# EAGLE board SparkFun_esp32_Environment_Sensor_Shield_Panel_v10 (EAGLE 7.5.0), part 1 of 3
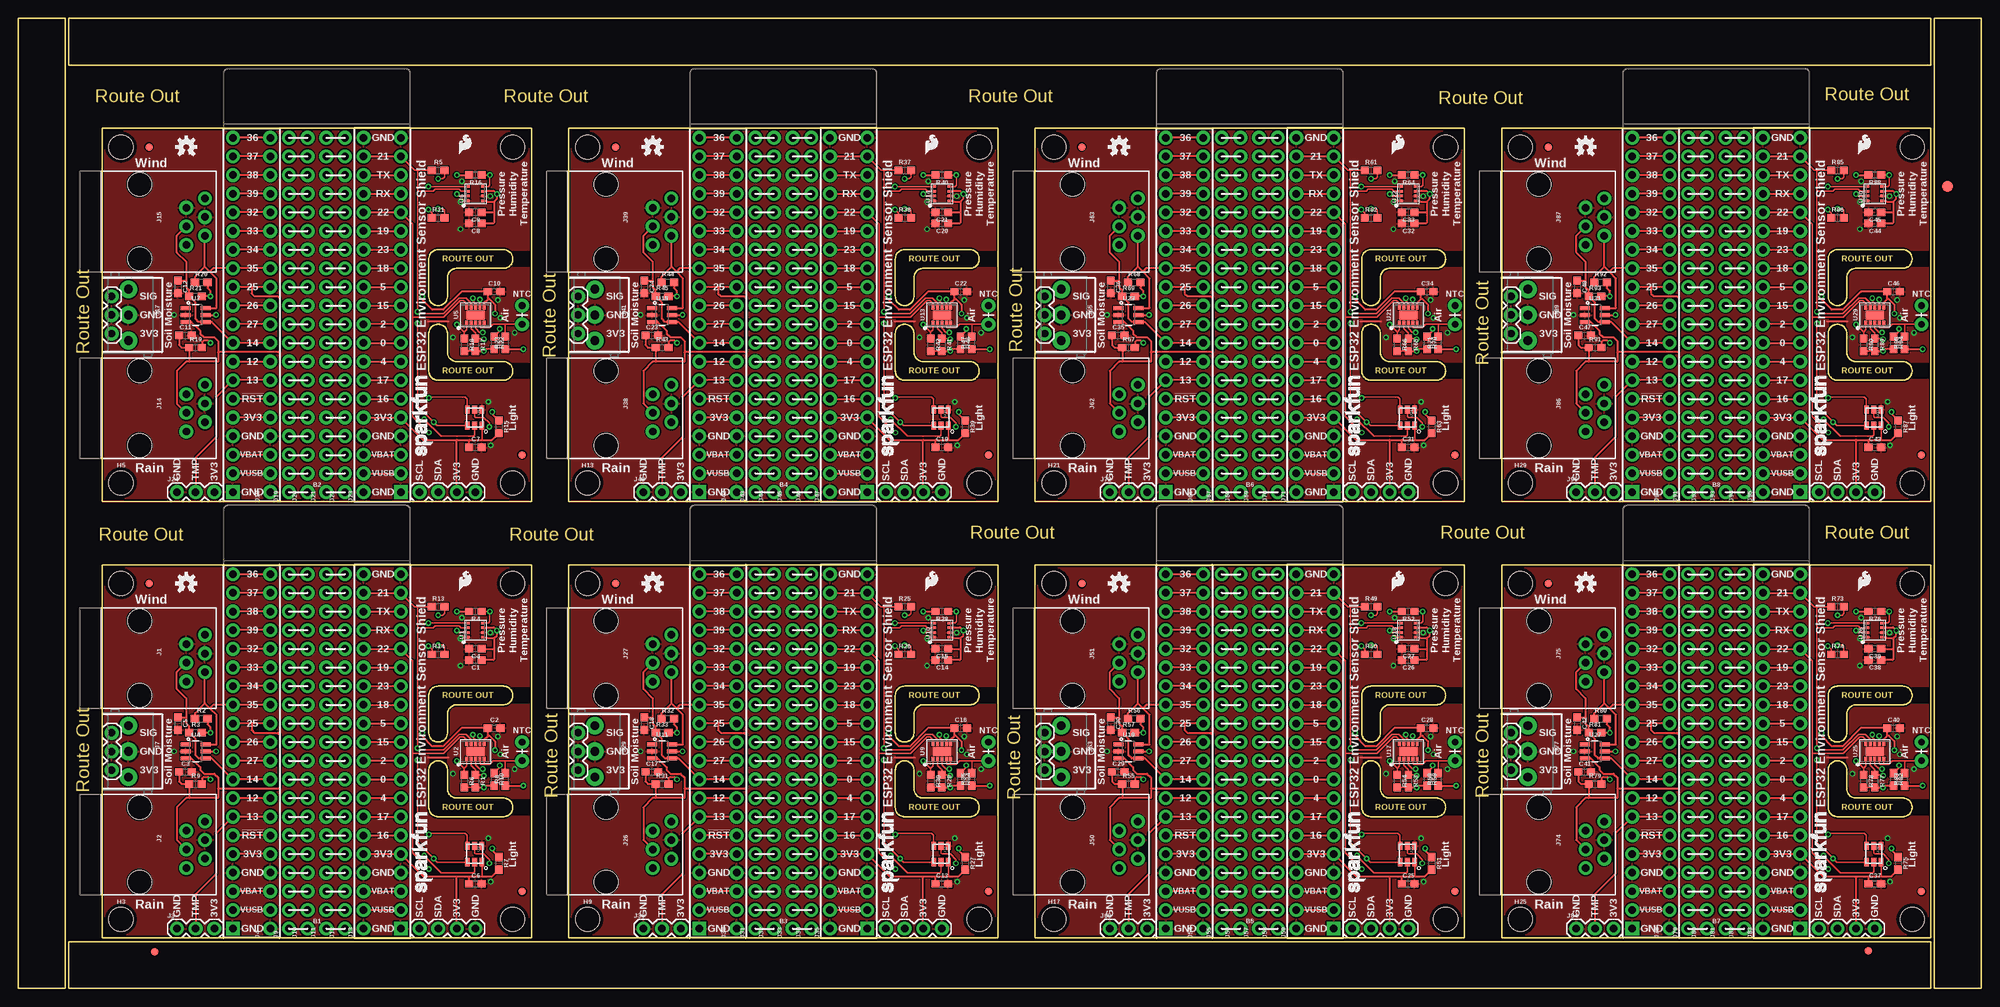
[diagram p0: board, top side]
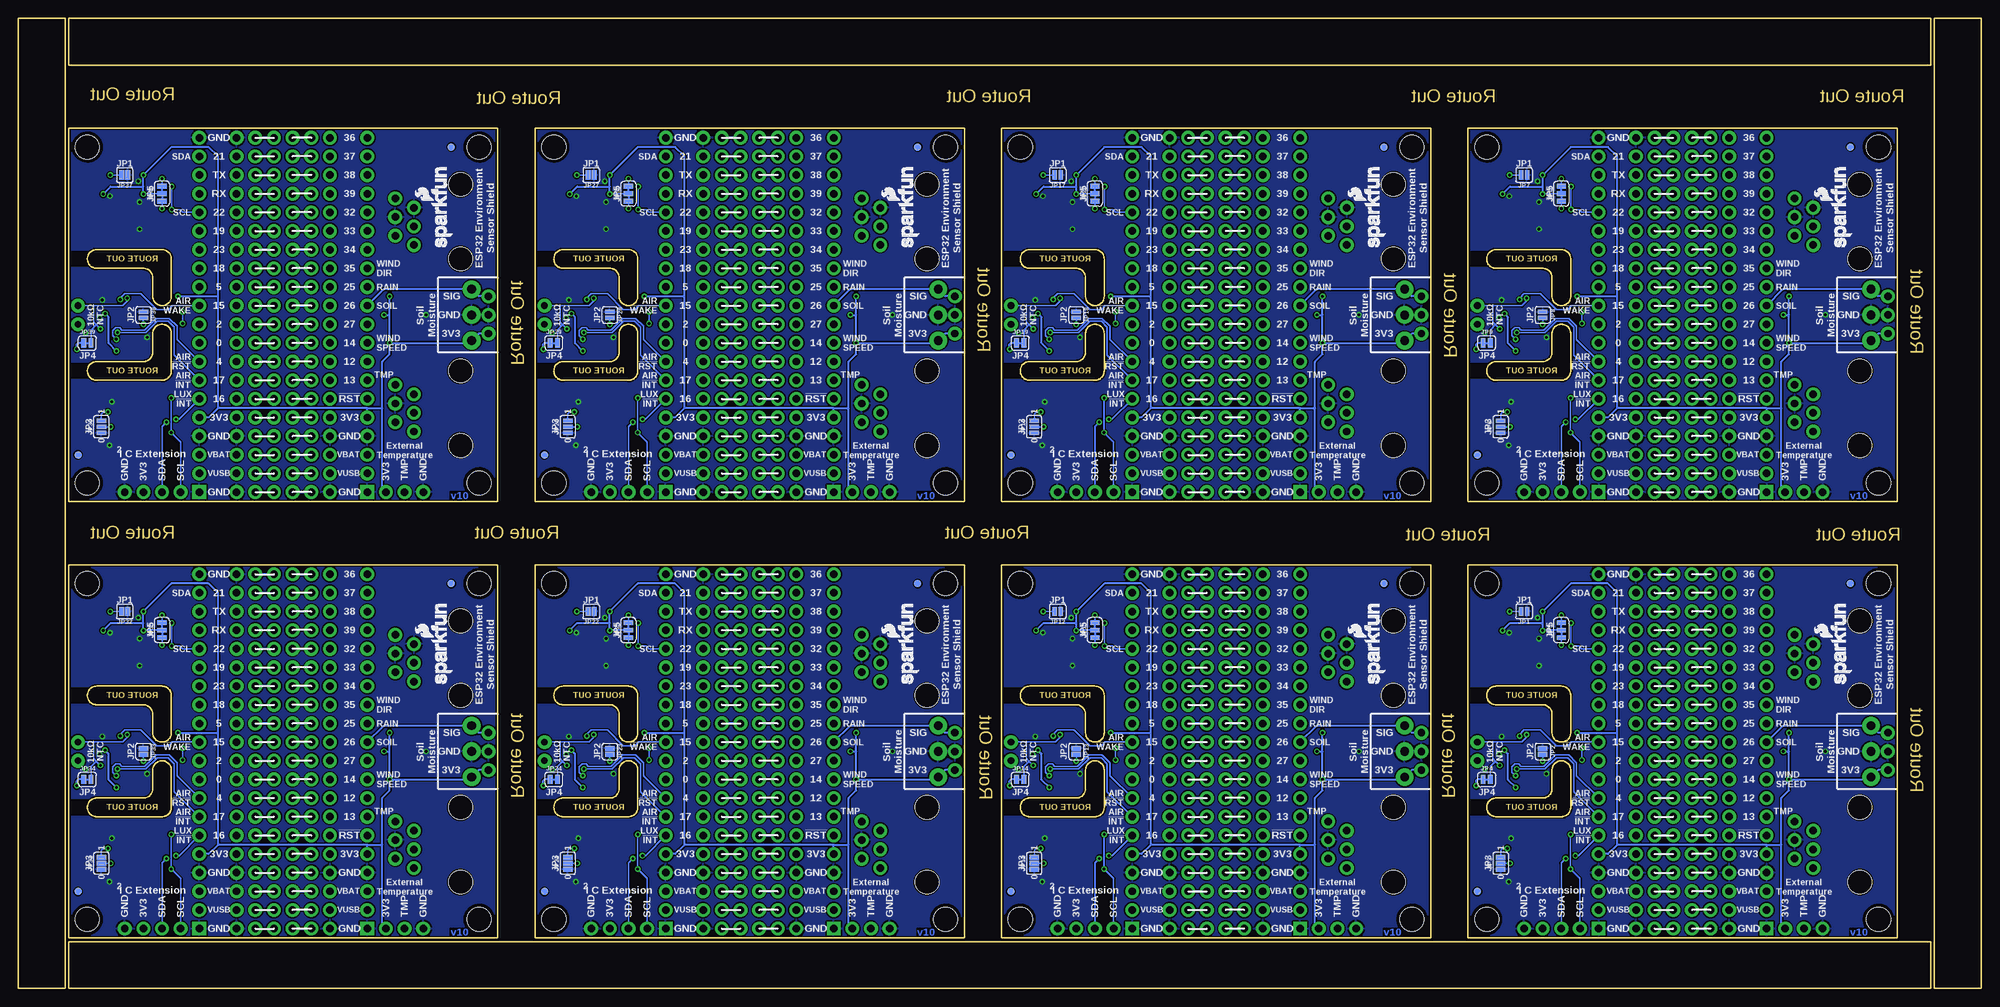
[diagram p1: board, bottom side, seen from below]

Size 267.21 x 132.08 mm. Coordinates in mm from the lower left corner, seen from the top.
Outline: 216 segments
Copper layers (1*16): Top 0.035mm / dielectric 1.5mm / Bottom 0.035mm
Design rules "SparkFun-2-layer-TIGHT": minimum track width 7mil, minimum drill 15mil, track to track 7mil, track to pad 7mil, pad to pad 7mil, via to via 7mil, smd to smd 7mil, copper to edge 7mil, drill to drill 7mil, minimum pad ring 7mil, minimum via ring 7mil, stop-mask expansion 4mil, vias tented up to drill 25mil, thermal gap 10mil
Milling: area 55.9,33.5 to 67.3,41.1; area 55.9,23.4 to 67.3,31; area 55.9,93 to 67.3,100.6; area 55.9,82.8 to 67.3,90.4; area 119.4,33.5 to 130.8,41.1; area 119.4,23.4 to 130.8,31; area 119.4,93 to 130.8,100.6; area 119.4,82.8 to 130.8,90.4; area 182.9,33.5 to 194.3,41.1; area 182.9,23.4 to 194.3,31; area 182.9,93 to 194.3,100.6; area 182.9,82.8 to 194.3,90.4; 4 more areas

## Footprints (pad centres in the part's own frame; a part is rotated, then mirrored left to right if it is on the bottom)
ESP32_THING = drill 1.016 pad 1.88 square: 1 1.27,1.27; 40 24.13,1.27 | drill 1.016 pad 1.88: 2 1.27,3.81; 3 1.27,6.35; 4 1.27,8.89; 5 1.27,11.43; 6 1.27,13.97; 7 1.27,16.51; 8 1.27,19.05; 9 1.27,21.59; 10 1.27,24.13; 11 1.27,26.67; 12 1.27,29.21; 13 1.27,31.75; 14 1.27,34.29; 15 1.27,36.83; 16 1.27,39.37; 17 1.27,41.91; 18 1.27,44.45; 19 1.27,46.99; 20 1.27,49.53; 21 24.13,49.53; 22 24.13,46.99; 23 24.13,44.45; 24 24.13,41.91; 25 24.13,39.37; 26 24.13,36.83; 27 24.13,34.29; 28 24.13,31.75; 29 24.13,29.21; 30 24.13,26.67; 31 24.13,24.13; 32 24.13,21.59; 33 24.13,19.05; 34 24.13,16.51; 35 24.13,13.97; 36 24.13,11.43; 37 24.13,8.89; 38 24.13,6.35; 39 24.13,3.81
0603 = smd 1.1 x 1: 1 -0.85,0; 2 0.85,0
FIDUCIAL-1.5X3 = smd 1.5 x 1.5: 1 0,0
FIDUCIAL-1X2 = smd 1 x 1: 1 0,0
STAND-OFF = hole 3.302: 0,0
RJ11-6 = drill 1.016 pad 1.88: 1 -3.175,8.89; 2 -1.905,6.35; 3 -0.635,8.89; 4 0.635,6.35; 5 1.905,8.89; 6 3.175,6.35 | hole 3.251: -5.08,0; 5.08,0
1X03 = drill 1.016 pad 1.88: 1 0,0; 2 2.54,0; 3 5.08,0
1X20_NOSILK = drill 1.016 pad 1.88: 1 0,0; 2 2.54,0; 3 5.08,0; 4 7.62,0; 5 10.16,0; 6 12.7,0; 7 15.24,0; 8 17.78,0; 9 20.32,0; 10 22.86,0; 11 25.4,0; 12 27.94,0; 13 30.48,0; 14 33.02,0; 15 35.56,0; 16 38.1,0; 17 40.64,0; 18 43.18,0; 19 45.72,0; 20 48.26,0
1X04 = drill 1.016 pad 1.88: 1 0,0; 2 2.54,0; 3 5.08,0; 4 7.62,0
SCREWTERMINAL-3.5MM-3-NS = drill 1.2 pad 2.413: 1 0,0; 2 3.5,0; 3 7,0
SMT-JUMPER_2_NO_SILK = smd 0.635 x 1.27: 1 -0.406,0; 2 0.406,0
SMT-JUMPER_3_NO_SILK = smd 0.635 x 1.27: 1 -0.813,0; 2 0,0; 3 0.813,0
SMT-JUMPER_2_NC_TRACE_SILK = smd 0.635 x 1.27: 1 -0.508,0; 2 0.508,0
SMT-JUMPER_3_2-NC_TRACE_SILK = smd 0.635 x 1.27: 1 -1.016,0; 2 0,0; 3 1.016,0
AXIAL-0.1 = drill 0.9 pad 1.88: P$1 -1.27,0; P$2 1.27,0
LGA-8-2.5X2.5 = smd 0.35 x 0.5: 1 -0.975,1.025; 2 -0.325,1.025; 3 0.325,1.025; 4 0.975,1.025; 5 0.975,-1.025; 6 0.325,-1.025; 7 -0.325,-1.025; 8 -0.975,-1.025
LGA10-2.7X4.0MM = smd 0.7 x 0.4: 1 -1.1,1.2; 2 -1.1,0.6; 3 -1.1,0; 4 -1.1,-0.6; 5 -1.1,-1.2; 6 1.1,-1.2; 7 1.1,-0.6; 8 1.1,0; 9 1.1,0.6; 10 1.1,1.2 | smd 1.25 x 2.45: EP 0,0
CHIPLED-6 = smd 1.1 x 0.6: P1 1.1,1; P2 -1.1,1; P4 -1.1,-1; P5 1.1,-1 | smd 1.1 x 0.7: P3 -1.1,0; P6 1.1,0
SOT-23-6 = smd 0.55 x 1.35: 1 -0.95,-1.375; 2 0,-1.375; 3 0.95,-1.375; 4 0.95,1.375; 5 0,1.375; 6 -0.95,1.375

## Placement (x,y rotation side)
B1  ESP32_THING  [ESP32_THING]  27.94,6.86 0 top
B2  ESP32_THING  [ESP32_THING]  27.94,66.29 0 top
B3  ESP32_THING  [ESP32_THING]  91.44,6.86 0 top
B4  ESP32_THING  [ESP32_THING]  91.44,66.29 0 top
B5  ESP32_THING  [ESP32_THING]  154.94,6.86 0 top
B6  ESP32_THING  [ESP32_THING]  154.94,66.29 0 top
B7  ESP32_THING  [ESP32_THING]  218.44,6.86 0 top
B8  ESP32_THING  [ESP32_THING]  218.44,66.29 0 top
C1  0.1uF  [0603]  62.23,44.7 180 top
C2  1.0uF  [0603]  64.77,35.43 0 top
C3  1.0uF  [0603]  22.73,29.46 0 top
C4  0.1uF  [0603]  62.23,46.23 180 top
C5  1.0uF  [0603]  21.72,36.07 270 top
C6  0.1uF  [0603]  62.23,14.22 0 top
C7  0.1uF  [0603]  62.23,73.66 0 top
C8  0.1uF  [0603]  62.23,104.14 180 top
C9  0.1uF  [0603]  62.23,105.66 180 top
C10  1.0uF  [0603]  64.77,94.87 0 top
C11  1.0uF  [0603]  22.73,88.9 0 top
C12  1.0uF  [0603]  21.72,95.5 270 top
C13  0.1uF  [0603]  125.73,14.22 0 top
C14  0.1uF  [0603]  125.73,44.7 180 top
C15  0.1uF  [0603]  125.73,46.23 180 top
C16  1.0uF  [0603]  128.27,35.43 0 top
C17  1.0uF  [0603]  86.23,29.46 0 top
C18  1.0uF  [0603]  85.22,36.07 270 top
C19  0.1uF  [0603]  125.73,73.66 0 top
C20  0.1uF  [0603]  125.73,104.14 180 top
C21  0.1uF  [0603]  125.73,105.66 180 top
C22  1.0uF  [0603]  128.27,94.87 0 top
C23  1.0uF  [0603]  86.23,88.9 0 top
C24  1.0uF  [0603]  85.22,95.5 270 top
C25  0.1uF  [0603]  189.23,14.22 0 top
C26  0.1uF  [0603]  189.23,44.7 180 top
C27  0.1uF  [0603]  189.23,46.23 180 top
C28  1.0uF  [0603]  191.77,35.43 0 top
C29  1.0uF  [0603]  149.73,29.46 0 top
C30  1.0uF  [0603]  148.72,36.07 270 top
C31  0.1uF  [0603]  189.23,73.66 0 top
C32  0.1uF  [0603]  189.23,104.14 180 top
C33  0.1uF  [0603]  189.23,105.66 180 top
C34  1.0uF  [0603]  191.77,94.87 0 top
C35  1.0uF  [0603]  149.73,88.9 0 top
C36  1.0uF  [0603]  148.72,95.5 270 top
C37  0.1uF  [0603]  252.73,14.22 0 top
C38  0.1uF  [0603]  252.73,44.7 180 top
C39  0.1uF  [0603]  252.73,46.23 180 top
C40  1.0uF  [0603]  255.27,35.43 0 top
C41  1.0uF  [0603]  213.23,29.46 0 top
C42  1.0uF  [0603]  212.22,36.07 270 top
C43  0.1uF  [0603]  252.73,73.66 0 top
C44  0.1uF  [0603]  252.73,104.14 180 top
C45  0.1uF  [0603]  252.73,105.66 180 top
C46  1.0uF  [0603]  255.27,94.87 0 top
C47  1.0uF  [0603]  213.23,88.9 0 top
C48  1.0uF  [0603]  212.22,95.5 270 top
E$1  [FIDUCIAL-1.5X3]  262.64,109.22 0 top
E$3  [FIDUCIAL-1X2]  18.54,4.95 270 top
E$5  [FIDUCIAL-1X2]  251.84,5.08 0 top
FD1  FIDUCIAL1X2  [FIDUCIAL-1X2]  17.78,55.12 0 top
FD2  FIDUCIAL1X2  [FIDUCIAL-1X2]  68.58,13.21 0 top
FD3  FIDUCIAL1X2  [FIDUCIAL-1X2]  68.58,13.21 0 bottom
FD4  FIDUCIAL1X2  [FIDUCIAL-1X2]  17.78,55.12 0 bottom
FD5  FIDUCIAL1X2  [FIDUCIAL-1X2]  17.78,114.55 0 top
FD6  FIDUCIAL1X2  [FIDUCIAL-1X2]  68.58,72.64 0 top
FD7  FIDUCIAL1X2  [FIDUCIAL-1X2]  68.58,72.64 0 bottom
FD8  FIDUCIAL1X2  [FIDUCIAL-1X2]  17.78,114.55 0 bottom
FD9  FIDUCIAL1X2  [FIDUCIAL-1X2]  81.28,55.12 0 top
FD10  FIDUCIAL1X2  [FIDUCIAL-1X2]  132.08,13.21 0 top
FD11  FIDUCIAL1X2  [FIDUCIAL-1X2]  132.08,13.21 0 bottom
FD12  FIDUCIAL1X2  [FIDUCIAL-1X2]  81.28,55.12 0 bottom
FD13  FIDUCIAL1X2  [FIDUCIAL-1X2]  81.28,114.55 0 top
FD14  FIDUCIAL1X2  [FIDUCIAL-1X2]  132.08,72.64 0 top
FD15  FIDUCIAL1X2  [FIDUCIAL-1X2]  132.08,72.64 0 bottom
FD16  FIDUCIAL1X2  [FIDUCIAL-1X2]  81.28,114.55 0 bottom
FD17  FIDUCIAL1X2  [FIDUCIAL-1X2]  144.78,55.12 0 top
FD18  FIDUCIAL1X2  [FIDUCIAL-1X2]  195.58,13.21 0 top
FD19  FIDUCIAL1X2  [FIDUCIAL-1X2]  195.58,13.21 0 bottom
FD20  FIDUCIAL1X2  [FIDUCIAL-1X2]  144.78,55.12 0 bottom
FD21  FIDUCIAL1X2  [FIDUCIAL-1X2]  144.78,114.55 0 top
FD22  FIDUCIAL1X2  [FIDUCIAL-1X2]  195.58,72.64 0 top
FD23  FIDUCIAL1X2  [FIDUCIAL-1X2]  195.58,72.64 0 bottom
FD24  FIDUCIAL1X2  [FIDUCIAL-1X2]  144.78,114.55 0 bottom
FD25  FIDUCIAL1X2  [FIDUCIAL-1X2]  208.28,55.12 0 top
FD26  FIDUCIAL1X2  [FIDUCIAL-1X2]  259.08,13.21 0 top
FD27  FIDUCIAL1X2  [FIDUCIAL-1X2]  259.08,13.21 0 bottom
FD28  FIDUCIAL1X2  [FIDUCIAL-1X2]  208.28,55.12 0 bottom
FD29  FIDUCIAL1X2  [FIDUCIAL-1X2]  208.28,114.55 0 top
FD30  FIDUCIAL1X2  [FIDUCIAL-1X2]  259.08,72.64 0 top
FD31  FIDUCIAL1X2  [FIDUCIAL-1X2]  259.08,72.64 0 bottom
FD32  FIDUCIAL1X2  [FIDUCIAL-1X2]  208.28,114.55 0 bottom
H1  STAND-OFF  [STAND-OFF]  67.31,55.12 0 top
H2  STAND-OFF  [STAND-OFF]  13.97,55.12 0 top
H3  STAND-OFF  [STAND-OFF]  13.97,9.4 0 top
H4  STAND-OFF  [STAND-OFF]  67.31,9.4 0 top
H5  STAND-OFF  [STAND-OFF]  13.97,68.83 0 top
H6  STAND-OFF  [STAND-OFF]  67.31,68.83 0 top
H7  STAND-OFF  [STAND-OFF]  13.97,114.55 0 top
H8  STAND-OFF  [STAND-OFF]  67.31,114.55 0 top
H9  STAND-OFF  [STAND-OFF]  77.47,9.4 0 top
H10  STAND-OFF  [STAND-OFF]  130.81,9.4 0 top
H11  STAND-OFF  [STAND-OFF]  77.47,55.12 0 top
H12  STAND-OFF  [STAND-OFF]  130.81,55.12 0 top
H13  STAND-OFF  [STAND-OFF]  77.47,68.83 0 top
H14  STAND-OFF  [STAND-OFF]  130.81,68.83 0 top
H15  STAND-OFF  [STAND-OFF]  77.47,114.55 0 top
H16  STAND-OFF  [STAND-OFF]  130.81,114.55 0 top
H17  STAND-OFF  [STAND-OFF]  140.97,9.4 0 top
H18  STAND-OFF  [STAND-OFF]  194.31,9.4 0 top
H19  STAND-OFF  [STAND-OFF]  140.97,55.12 0 top
H20  STAND-OFF  [STAND-OFF]  194.31,55.12 0 top
H21  STAND-OFF  [STAND-OFF]  140.97,68.83 0 top
H22  STAND-OFF  [STAND-OFF]  194.31,68.83 0 top
H23  STAND-OFF  [STAND-OFF]  140.97,114.55 0 top
H24  STAND-OFF  [STAND-OFF]  194.31,114.55 0 top
H25  STAND-OFF  [STAND-OFF]  204.47,9.4 0 top
H26  STAND-OFF  [STAND-OFF]  257.81,9.4 0 top
H27  STAND-OFF  [STAND-OFF]  204.47,55.12 0 top
H28  STAND-OFF  [STAND-OFF]  257.81,55.12 0 top
H29  STAND-OFF  [STAND-OFF]  204.47,68.83 0 top
H30  STAND-OFF  [STAND-OFF]  257.81,68.83 0 top
H31  STAND-OFF  [STAND-OFF]  204.47,114.55 0 top
H32  STAND-OFF  [STAND-OFF]  257.81,114.55 0 top
J1  WEATHER_METER-WIND  [RJ11-6]  16.51,44.96 270 top
J2  WEATHER_METER-RAIN  [RJ11-6]  16.51,19.56 270 top
J3  [1X03]  21.59,8.13 0 top
J4  [1X20_NOSILK]  34.29,8.13 90 top
J5  [1X03]  12.7,29.72 90 top
J6  [1X04]  62.23,67.56 180 top
J7  [SCREWTERMINAL-3.5MM-3-NS]  14.99,35.76 270 top
J8  [1X04]  62.23,8.13 180 top
J9  [1X20_NOSILK]  36.83,8.13 90 top
J10  [1X20_NOSILK]  39.37,8.13 90 top
J11  [1X20_NOSILK]  41.91,8.13 90 top
J12  [1X20_NOSILK]  44.45,8.13 90 top
J13  [1X20_NOSILK]  46.99,8.13 90 top
J14  WEATHER_METER-RAIN  [RJ11-6]  16.51,78.99 270 top
J15  WEATHER_METER-WIND  [RJ11-6]  16.51,104.39 270 top
J16  [1X03]  12.7,89.15 90 top
J17  [SCREWTERMINAL-3.5MM-3-NS]  14.99,95.19 270 top
J18  [1X20_NOSILK]  34.29,67.56 90 top
J19  [1X20_NOSILK]  36.83,67.56 90 top
J20  [1X20_NOSILK]  39.37,67.56 90 top
J21  [1X20_NOSILK]  41.91,67.56 90 top
J22  [1X20_NOSILK]  44.45,67.56 90 top
J23  [1X20_NOSILK]  46.99,67.56 90 top
J24  [1X03]  21.59,67.56 0 top
J25  [1X04]  125.73,8.13 180 top
J26  WEATHER_METER-RAIN  [RJ11-6]  80.01,19.56 270 top
J27  WEATHER_METER-WIND  [RJ11-6]  80.01,44.96 270 top
J28  [1X03]  76.2,29.72 90 top
J29  [SCREWTERMINAL-3.5MM-3-NS]  78.49,35.76 270 top
J30  [1X20_NOSILK]  97.79,8.13 90 top
J31  [1X20_NOSILK]  100.33,8.13 90 top
J32  [1X20_NOSILK]  102.87,8.13 90 top
J33  [1X20_NOSILK]  105.41,8.13 90 top
J34  [1X20_NOSILK]  107.95,8.13 90 top
J35  [1X20_NOSILK]  110.49,8.13 90 top
J36  [1X03]  85.09,8.13 0 top
J37  [1X04]  125.73,67.56 180 top
J38  WEATHER_METER-RAIN  [RJ11-6]  80.01,78.99 270 top
J39  WEATHER_METER-WIND  [RJ11-6]  80.01,104.39 270 top
J40  [1X03]  76.2,89.15 90 top
J41  [SCREWTERMINAL-3.5MM-3-NS]  78.49,95.19 270 top
J42  [1X20_NOSILK]  97.79,67.56 90 top
J43  [1X20_NOSILK]  100.33,67.56 90 top
J44  [1X20_NOSILK]  102.87,67.56 90 top
J45  [1X20_NOSILK]  105.41,67.56 90 top
J46  [1X20_NOSILK]  107.95,67.56 90 top
J47  [1X20_NOSILK]  110.49,67.56 90 top
J48  [1X03]  85.09,67.56 0 top
J49  [1X04]  189.23,8.13 180 top
J50  WEATHER_METER-RAIN  [RJ11-6]  143.51,19.56 270 top
J51  WEATHER_METER-WIND  [RJ11-6]  143.51,44.96 270 top
J52  [1X03]  139.7,29.72 90 top
J53  [SCREWTERMINAL-3.5MM-3-NS]  141.99,35.76 270 top
J54  [1X20_NOSILK]  161.29,8.13 90 top
J55  [1X20_NOSILK]  163.83,8.13 90 top
J56  [1X20_NOSILK]  166.37,8.13 90 top
J57  [1X20_NOSILK]  168.91,8.13 90 top
J58  [1X20_NOSILK]  171.45,8.13 90 top
J59  [1X20_NOSILK]  173.99,8.13 90 top
J60  [1X03]  148.59,8.13 0 top
J61  [1X04]  189.23,67.56 180 top
J62  WEATHER_METER-RAIN  [RJ11-6]  143.51,78.99 270 top
J63  WEATHER_METER-WIND  [RJ11-6]  143.51,104.39 270 top
J64  [1X03]  139.7,89.15 90 top
J65  [SCREWTERMINAL-3.5MM-3-NS]  141.99,95.19 270 top
J66  [1X20_NOSILK]  161.29,67.56 90 top
J67  [1X20_NOSILK]  163.83,67.56 90 top
J68  [1X20_NOSILK]  166.37,67.56 90 top
J69  [1X20_NOSILK]  168.91,67.56 90 top
J70  [1X20_NOSILK]  171.45,67.56 90 top
J71  [1X20_NOSILK]  173.99,67.56 90 top
J72  [1X03]  148.59,67.56 0 top
J73  [1X04]  252.73,8.13 180 top
J74  WEATHER_METER-RAIN  [RJ11-6]  207.01,19.56 270 top
J75  WEATHER_METER-WIND  [RJ11-6]  207.01,44.96 270 top
J76  [1X03]  203.2,29.72 90 top
J77  [SCREWTERMINAL-3.5MM-3-NS]  205.49,35.76 270 top
J78  [1X20_NOSILK]  224.79,8.13 90 top
J79  [1X20_NOSILK]  227.33,8.13 90 top
J80  [1X20_NOSILK]  229.87,8.13 90 top
J81  [1X20_NOSILK]  232.41,8.13 90 top
J82  [1X20_NOSILK]  234.95,8.13 90 top
J83  [1X20_NOSILK]  237.49,8.13 90 top
J84  [1X03]  212.09,8.13 0 top
J85  [1X04]  252.73,67.56 180 top
J86  WEATHER_METER-RAIN  [RJ11-6]  207.01,78.99 270 top
J87  WEATHER_METER-WIND  [RJ11-6]  207.01,104.39 270 top
J88  [1X03]  203.2,89.15 90 top
J89  [SCREWTERMINAL-3.5MM-3-NS]  205.49,95.19 270 top
J90  [1X20_NOSILK]  224.79,67.56 90 top
J91  [1X20_NOSILK]  227.33,67.56 90 top
J92  [1X20_NOSILK]  229.87,67.56 90 top
J93  [1X20_NOSILK]  232.41,67.56 90 top
J94  [1X20_NOSILK]  234.95,67.56 90 top
J95  [1X20_NOSILK]  237.49,67.56 90 top
J96  [1X03]  212.09,67.56 0 top
JP1  [SMT-JUMPER_2_NO_SILK]  62.23,51.31 180 bottom
JP2  [SMT-JUMPER_2_NO_SILK]  59.69,32.26 270 bottom
JP3  [SMT-JUMPER_3_NO_SILK]  65.41,17.02 90 bottom
JP4  [SMT-JUMPER_2_NC_TRACE_SILK]  67.31,28.45 0 bottom
JP5  [SMT-JUMPER_3_2-NC_TRACE_SILK]  57.15,48.77 90 bottom
JP6  [SMT-JUMPER_3_NO_SILK]  65.41,76.45 90 bottom
JP7  [SMT-JUMPER_2_NO_SILK]  62.23,110.74 180 bottom
JP8  [SMT-JUMPER_2_NO_SILK]  59.69,91.69 270 bottom
JP9  [SMT-JUMPER_2_NC_TRACE_SILK]  67.31,87.88 0 bottom
JP10  [SMT-JUMPER_3_2-NC_TRACE_SILK]  57.15,108.2 90 bottom
JP11  [SMT-JUMPER_3_NO_SILK]  128.91,17.02 90 bottom
JP12  [SMT-JUMPER_2_NO_SILK]  125.73,51.31 180 bottom
JP13  [SMT-JUMPER_2_NO_SILK]  123.19,32.26 270 bottom
JP14  [SMT-JUMPER_2_NC_TRACE_SILK]  130.81,28.45 0 bottom
JP15  [SMT-JUMPER_3_2-NC_TRACE_SILK]  120.65,48.77 90 bottom
JP16  [SMT-JUMPER_3_NO_SILK]  128.91,76.45 90 bottom
JP17  [SMT-JUMPER_2_NO_SILK]  125.73,110.74 180 bottom
JP18  [SMT-JUMPER_2_NO_SILK]  123.19,91.69 270 bottom
JP19  [SMT-JUMPER_2_NC_TRACE_SILK]  130.81,87.88 0 bottom
JP20  [SMT-JUMPER_3_2-NC_TRACE_SILK]  120.65,108.2 90 bottom
JP21  [SMT-JUMPER_3_NO_SILK]  192.41,17.02 90 bottom
JP22  [SMT-JUMPER_2_NO_SILK]  189.23,51.31 180 bottom
JP23  [SMT-JUMPER_2_NO_SILK]  186.69,32.26 270 bottom
JP24  [SMT-JUMPER_2_NC_TRACE_SILK]  194.31,28.45 0 bottom
JP25  [SMT-JUMPER_3_2-NC_TRACE_SILK]  184.15,48.77 90 bottom
JP26  [SMT-JUMPER_3_NO_SILK]  192.41,76.45 90 bottom
JP27  [SMT-JUMPER_2_NO_SILK]  189.23,110.74 180 bottom
JP28  [SMT-JUMPER_2_NO_SILK]  186.69,91.69 270 bottom
JP29  [SMT-JUMPER_2_NC_TRACE_SILK]  194.31,87.88 0 bottom
JP30  [SMT-JUMPER_3_2-NC_TRACE_SILK]  184.15,108.2 90 bottom
JP31  [SMT-JUMPER_3_NO_SILK]  255.91,17.02 90 bottom
JP32  [SMT-JUMPER_2_NO_SILK]  252.73,51.31 180 bottom
JP33  [SMT-JUMPER_2_NO_SILK]  250.19,32.26 270 bottom
JP34  [SMT-JUMPER_2_NC_TRACE_SILK]  257.81,28.45 0 bottom
JP35  [SMT-JUMPER_3_2-NC_TRACE_SILK]  247.65,48.77 90 bottom
JP36  [SMT-JUMPER_3_NO_SILK]  255.91,76.45 90 bottom
JP37  [SMT-JUMPER_2_NO_SILK]  252.73,110.74 180 bottom
JP38  [SMT-JUMPER_2_NO_SILK]  250.19,91.69 270 bottom
JP39  [SMT-JUMPER_2_NC_TRACE_SILK]  257.81,87.88 0 bottom
JP40  [SMT-JUMPER_3_2-NC_TRACE_SILK]  247.65,108.2 90 bottom
LOGO1  SFE_LOGO_NAME.1_INCH  [SFE_LOGO_NAME_.1]  56.9,12.57 90 top
LOGO2  SFE_LOGO_NAME_FLAME.1_INCH  [SFE_LOGO_NAME_FLAME_.1]  17.53,41.02 90 bottom
LOGO3  SFE_LOGO_FLAME.1_INCH  [SFE_LOGO_FLAME_.1]  59.69,53.85 0 top
LOGO4  OSHW-LOGOS  [OSHW-LOGO-S]  22.86,55.12 0 top
LOGO5  SFE_LOGO_NAME.1_INCH  [SFE_LOGO_NAME_.1]  56.9,72.01 90 top
LOGO6  OSHW-LOGOS  [OSHW-LOGO-S]  22.86,114.55 0 top
LOGO7  SFE_LOGO_NAME_FLAME.1_INCH  [SFE_LOGO_NAME_FLAME_.1]  17.53,100.46 90 bottom
LOGO8  SFE_LOGO_FLAME.1_INCH  [SFE_LOGO_FLAME_.1]  59.69,113.28 0 top
LOGO9  SFE_LOGO_NAME.1_INCH  [SFE_LOGO_NAME_.1]  120.4,12.57 90 top
LOGO10  OSHW-LOGOS  [OSHW-LOGO-S]  86.36,55.12 0 top
LOGO11  SFE_LOGO_NAME_FLAME.1_INCH  [SFE_LOGO_NAME_FLAME_.1]  81.03,41.02 90 bottom
LOGO12  SFE_LOGO_FLAME.1_INCH  [SFE_LOGO_FLAME_.1]  123.19,53.85 0 top
LOGO13  SFE_LOGO_NAME.1_INCH  [SFE_LOGO_NAME_.1]  120.4,72.01 90 top
LOGO14  OSHW-LOGOS  [OSHW-LOGO-S]  86.36,114.55 0 top
LOGO15  SFE_LOGO_NAME_FLAME.1_INCH  [SFE_LOGO_NAME_FLAME_.1]  81.03,100.46 90 bottom
LOGO16  SFE_LOGO_FLAME.1_INCH  [SFE_LOGO_FLAME_.1]  123.19,113.28 0 top
LOGO17  SFE_LOGO_NAME.1_INCH  [SFE_LOGO_NAME_.1]  183.9,12.57 90 top
LOGO18  OSHW-LOGOS  [OSHW-LOGO-S]  149.86,55.12 0 top
LOGO19  SFE_LOGO_NAME_FLAME.1_INCH  [SFE_LOGO_NAME_FLAME_.1]  144.53,41.02 90 bottom
LOGO20  SFE_LOGO_FLAME.1_INCH  [SFE_LOGO_FLAME_.1]  186.69,53.85 0 top
LOGO21  SFE_LOGO_NAME.1_INCH  [SFE_LOGO_NAME_.1]  183.9,72.01 90 top
LOGO22  OSHW-LOGOS  [OSHW-LOGO-S]  149.86,114.55 0 top
LOGO23  SFE_LOGO_NAME_FLAME.1_INCH  [SFE_LOGO_NAME_FLAME_.1]  144.53,100.46 90 bottom
LOGO24  SFE_LOGO_FLAME.1_INCH  [SFE_LOGO_FLAME_.1]  186.69,113.28 0 top
LOGO25  SFE_LOGO_NAME.1_INCH  [SFE_LOGO_NAME_.1]  247.4,12.57 90 top
LOGO26  OSHW-LOGOS  [OSHW-LOGO-S]  213.36,55.12 0 top
LOGO27  SFE_LOGO_NAME_FLAME.1_INCH  [SFE_LOGO_NAME_FLAME_.1]  208.03,41.02 90 bottom
LOGO28  SFE_LOGO_FLAME.1_INCH  [SFE_LOGO_FLAME_.1]  250.19,53.85 0 top
LOGO29  SFE_LOGO_NAME.1_INCH  [SFE_LOGO_NAME_.1]  247.4,72.01 90 top
LOGO30  OSHW-LOGOS  [OSHW-LOGO-S]  213.36,114.55 0 top
LOGO31  SFE_LOGO_NAME_FLAME.1_INCH  [SFE_LOGO_NAME_FLAME_.1]  208.03,100.46 90 bottom
LOGO32  SFE_LOGO_FLAME.1_INCH  [SFE_LOGO_FLAME_.1]  250.19,113.28 0 top
R1  100k  [0603]  62.23,28.19 270 top
R2  10k  [0603]  24.89,36.7 0 top
R3  1k  [0603]  24.13,34.8 0 top
R4  100k  [0603]  62.23,51.31 180 top
R5  4.7k  [0603]  57.15,111.38 0 top
R6  100k  [0603]  60.71,28.19 270 top
R7  100k  [0603]  65.41,17.02 270 top
R8  10k  [0603]  66.29,28.45 90 top
R9  1k  [0603]  24.13,27.81 0 top
R10  10k  [0603]  64.77,28.45 270 top
R11  4.7k  [0603]  57.15,104.9 0 top
R12  DNP  [AXIAL-0.1]  68.58,32.26 270 top
R13  4.7k  [0603]  57.15,51.94 0 top
R14  4.7k  [0603]  57.15,45.47 0 top
R15  100k  [0603]  65.41,76.45 270 top
R16  100k  [0603]  62.23,110.74 180 top
R17  100k  [0603]  62.23,87.63 270 top
R18  100k  [0603]  60.71,87.63 270 top
R19  1k  [0603]  24.13,87.25 0 top
R20  10k  [0603]  24.89,96.14 0 top
R21  1k  [0603]  24.13,94.23 0 top
R22  10k  [0603]  64.77,87.88 270 top
R23  10k  [0603]  66.29,87.88 90 top
R24  DNP  [AXIAL-0.1]  68.58,91.69 270 top
R25  4.7k  [0603]  120.65,51.94 0 top
R26  4.7k  [0603]  120.65,45.47 0 top
R27  100k  [0603]  128.91,17.02 270 top
R28  100k  [0603]  125.73,51.31 180 top
R29  100k  [0603]  125.73,28.19 270 top
R30  100k  [0603]  124.21,28.19 270 top
R31  1k  [0603]  87.63,27.81 0 top
R32  10k  [0603]  88.39,36.7 0 top
R33  1k  [0603]  87.63,34.8 0 top
R34  10k  [0603]  128.27,28.45 270 top
R35  10k  [0603]  129.79,28.45 90 top
R36  DNP  [AXIAL-0.1]  132.08,32.26 270 top
R37  4.7k  [0603]  120.65,111.38 0 top
R38  4.7k  [0603]  120.65,104.9 0 top
R39  100k  [0603]  128.91,76.45 270 top
R40  100k  [0603]  125.73,110.74 180 top
R41  100k  [0603]  125.73,87.63 270 top
R42  100k  [0603]  124.21,87.63 270 top
R43  1k  [0603]  87.63,87.25 0 top
R44  10k  [0603]  88.39,96.14 0 top
R45  1k  [0603]  87.63,94.23 0 top
R46  10k  [0603]  128.27,87.88 270 top
R47  10k  [0603]  129.79,87.88 90 top
R48  DNP  [AXIAL-0.1]  132.08,91.69 270 top
R49  4.7k  [0603]  184.15,51.94 0 top
R50  4.7k  [0603]  184.15,45.47 0 top
R51  100k  [0603]  192.41,17.02 270 top
R52  100k  [0603]  189.23,51.31 180 top
R53  100k  [0603]  189.23,28.19 270 top
R54  100k  [0603]  187.71,28.19 270 top
R55  1k  [0603]  151.13,27.81 0 top
R56  10k  [0603]  151.89,36.7 0 top
R57  1k  [0603]  151.13,34.8 0 top
R58  10k  [0603]  191.77,28.45 270 top
R59  10k  [0603]  193.29,28.45 90 top
R60  DNP  [AXIAL-0.1]  195.58,32.26 270 top
R61  4.7k  [0603]  184.15,111.38 0 top
R62  4.7k  [0603]  184.15,104.9 0 top
R63  100k  [0603]  192.41,76.45 270 top
R64  100k  [0603]  189.23,110.74 180 top
R65  100k  [0603]  189.23,87.63 270 top
R66  100k  [0603]  187.71,87.63 270 top
R67  1k  [0603]  151.13,87.25 0 top
R68  10k  [0603]  151.89,96.14 0 top
R69  1k  [0603]  151.13,94.23 0 top
R70  10k  [0603]  191.77,87.88 270 top
R71  10k  [0603]  193.29,87.88 90 top
R72  DNP  [AXIAL-0.1]  195.58,91.69 270 top
R73  4.7k  [0603]  247.65,51.94 0 top
R74  4.7k  [0603]  247.65,45.47 0 top
R75  100k  [0603]  255.91,17.02 270 top
R76  100k  [0603]  252.73,51.31 180 top
R77  100k  [0603]  252.73,28.19 270 top
R78  100k  [0603]  251.21,28.19 270 top
R79  1k  [0603]  214.63,27.81 0 top
R80  10k  [0603]  215.39,36.7 0 top
R81  1k  [0603]  214.63,34.8 0 top
R82  10k  [0603]  255.27,28.45 270 top
R83  10k  [0603]  256.79,28.45 90 top
R84  DNP  [AXIAL-0.1]  259.08,32.26 270 top
R85  4.7k  [0603]  247.65,111.38 0 top
R86  4.7k  [0603]  247.65,104.9 0 top
R87  100k  [0603]  255.91,76.45 270 top
R88  100k  [0603]  252.73,110.74 180 top
R89  100k  [0603]  252.73,87.63 270 top
R90  100k  [0603]  251.21,87.63 270 top
R91  1k  [0603]  214.63,87.25 0 top
R92  10k  [0603]  215.39,96.14 0 top
R93  1k  [0603]  214.63,94.23 0 top
R94  10k  [0603]  255.27,87.88 270 top
R95  10k  [0603]  256.79,87.88 90 top
R96  DNP  [AXIAL-0.1]  259.08,91.69 270 top
U1  BME280  [LGA-8-2.5X2.5]  62.23,48.77 90 top
U2  CCS811  [LGA10-2.7X4.0MM]  62.23,32.26 90 top
U3  APDS-9301  [CHIPLED-6]  62.1,18.29 270 top
U4  TVS Diode  [SOT-23-6]  24.13,32.26 270 top
U5  CCS811  [LGA10-2.7X4.0MM]  62.23,91.69 90 top
U6  BME280  [LGA-8-2.5X2.5]  62.23,108.2 90 top
U7  TVS Diode  [SOT-23-6]  24.13,91.69 270 top
U8  APDS-9301  [CHIPLED-6]  62.1,77.72 270 top
U9  CCS811  [LGA10-2.7X4.0MM]  125.73,32.26 90 top
U10  BME280  [LGA-8-2.5X2.5]  125.73,48.77 90 top
U11  TVS Diode  [SOT-23-6]  87.63,32.26 270 top
U12  APDS-9301  [CHIPLED-6]  125.6,18.29 270 top
U13  CCS811  [LGA10-2.7X4.0MM]  125.73,91.69 90 top
U14  BME280  [LGA-8-2.5X2.5]  125.73,108.2 90 top
U15  TVS Diode  [SOT-23-6]  87.63,91.69 270 top
U16  APDS-9301  [CHIPLED-6]  125.6,77.72 270 top
U17  CCS811  [LGA10-2.7X4.0MM]  189.23,32.26 90 top
U18  BME280  [LGA-8-2.5X2.5]  189.23,48.77 90 top
U19  TVS Diode  [SOT-23-6]  151.13,32.26 270 top
U20  APDS-9301  [CHIPLED-6]  189.1,18.29 270 top
U21  CCS811  [LGA10-2.7X4.0MM]  189.23,91.69 90 top
U22  BME280  [LGA-8-2.5X2.5]  189.23,108.2 90 top
U23  TVS Diode  [SOT-23-6]  151.13,91.69 270 top
U24  APDS-9301  [CHIPLED-6]  189.1,77.72 270 top
U25  CCS811  [LGA10-2.7X4.0MM]  252.73,32.26 90 top
U26  BME280  [LGA-8-2.5X2.5]  252.73,48.77 90 top
U27  TVS Diode  [SOT-23-6]  214.63,32.26 270 top
U28  APDS-9301  [CHIPLED-6]  252.6,18.29 270 top
U29  CCS811  [LGA10-2.7X4.0MM]  252.73,91.69 90 top
U30  BME280  [LGA-8-2.5X2.5]  252.73,108.2 90 top
U31  TVS Diode  [SOT-23-6]  214.63,91.69 270 top
U32  APDS-9301  [CHIPLED-6]  252.6,77.72 270 top

## Library data of the parts
B1-B8 = SparkFun-Boards; SF_ID: DEV-13907
C1 C4 C6-C9 C13-C15 C19-C21 C25-C27 C31-C33 C37-C39 C43-C45 = SparkFun-Capacitors; PROD_ID: CAP-00810
C2 C3 C5 C10-C12 C16-C18 C22-C24 C28-C30 C34-C36 C40-C42 C46-C48 = SparkFun-Capacitors; PROD_ID: CAP-00868
E$1 = SparkFun-Retired
E$3 E$5 FD1-FD32 LOGO1-LOGO32 = SparkFun-Aesthetics
H1-H32 = SparkFun-Hardware
J1 J15 J27 J39 J51 J63 J75 J87 = esp32-environ-monitor-temp; PROD_ID: CONN-08590; SF_ID: PRT-00132
J2 J14 J26 J38 J50 J62 J74 J86 = esp32-environ-monitor-temp; PROD_ID: CONN-08590; SF_ID: SEN-08942
J3-J13 J16-J25 J28-J37 J40-J49 J52-J61 J64-J73 J76-J85 J88-J96 = SparkFun-Connectors
JP1-JP40 = SparkFun-Jumpers
R1 R4 R6 R7 R15-R18 R27-R30 R39-R42 R51-R54 R63-R66 R75-R78 R87-R90 = SparkFun-Resistors; PROD_ID: RES-07828
R2 R10 R20 R22 R32 R34 R44 R46 R56 R58 R68 R70 R80 R82 R92 R94 = SparkFun-Resistors; PROD_ID: RES-00824
R3 R9 R19 R21 R31 R33 R43 R45 R55 R57 R67 R69 R79 R81 R91 R93 = SparkFun-Resistors; PROD_ID: RES-07856
R5 R11 R13 R14 R25 R26 R37 R38 R49 R50 R61 R62 R73 R74 R85 R86 = SparkFun-Resistors; PROD_ID: RES-07857
R8 R23 R35 R47 R59 R71 R83 R95 = esp32-environ-monitor-temp; PROD_ID: RES-13608
R12 R24 R36 R48 R60 R72 R84 R96 = esp32-environ-monitor-temp; PROD_ID: N/A; SF_ID: SEN-00250
U1 U6 U10 U14 U18 U22 U26 U30 = SparkFun-Sensors; PROD_ID: IC-13090
U2 U5 U9 U13 U17 U21 U25 U29 = esp32-environ-monitor-temp; PROD_ID: IC-13607
U3 U8 U12 U16 U20 U24 U28 U32 = SparkFun-Sensors; PROD_ID: IC-13662
U4 U7 U11 U15 U19 U23 U27 U31 = esp32-environ-monitor-temp; PROD_ID: IC-13538

## Nets
3.3V: B1.5 B1.36 C1.1 C2.1 C4.1 C6.1 J3.3 J4.5 J5.1 J7.3 J8.2 J13.5 JP5.2 R1.2 R2.2 R3.2 R4.2 R6.2 R7.2 R9.2 R10.2 U1.2 U1.6 U1.8 U2.6 U3.P1 U4.5
3.3V1: B2.5 B2.36 C7.1 C8.1 C9.1 C10.1 J6.2 J16.1 J17.3 J18.5 J23.5 J24.3 JP10.2 R15.2 R16.2 R17.2 R18.2 R19.2 R20.2 R21.2 R22.2 U5.6 U6.2 U6.6 U6.8 U7.5 U8.P1
3.3V2: B3.5 B3.36 C13.1 C14.1 C15.1 C16.1 J25.2 J28.1 J29.3 J30.5 J35.5 J36.3 JP15.2 R27.2 R28.2 R29.2 R30.2 R31.2 R32.2 R33.2 R34.2 U9.6 U10.2 U10.6 U10.8 U11.5 U12.P1
3.3V3: B4.5 B4.36 C19.1 C20.1 C21.1 C22.1 J37.2 J40.1 J41.3 J42.5 J47.5 J48.3 JP20.2 R39.2 R40.2 R41.2 R42.2 R43.2 R44.2 R45.2 R46.2 U13.6 U14.2 U14.6 U14.8 U15.5 U16.P1
3.3V4: B5.5 B5.36 C25.1 C26.1 C27.1 C28.1 J49.2 J52.1 J53.3 J54.5 J59.5 J60.3 JP25.2 R51.2 R52.2 R53.2 R54.2 R55.2 R56.2 R57.2 R58.2 U17.6 U18.2 U18.6 U18.8 U19.5 U20.P1
3.3V5: B6.5 B6.36 C31.1 C32.1 C33.1 C34.1 J61.2 J64.1 J65.3 J66.5 J71.5 J72.3 JP30.2 R63.2 R64.2 R65.2 R66.2 R67.2 R68.2 R69.2 R70.2 U21.6 U22.2 U22.6 U22.8 U23.5 U24.P1
3.3V6: B7.5 B7.36 C37.1 C38.1 C39.1 C40.1 J73.2 J76.1 J77.3 J78.5 J83.5 J84.3 JP35.2 R75.2 R76.2 R77.2 R78.2 R79.2 R80.2 R81.2 R82.2 U25.6 U26.2 U26.6 U26.8 U27.5 U28.P1
3.3V7: B8.5 B8.36 C43.1 C44.1 C45.1 C46.1 J85.2 J88.1 J89.3 J90.5 J95.5 J96.3 JP40.2 R87.2 R88.2 R89.2 R90.2 R91.2 R92.2 R93.2 R94.2 U29.6 U30.2 U30.6 U30.8 U31.5 U32.P1
ADDR_TSL1: JP6.2 U8.P3
ADDR_TSL2: JP11.2 U12.P3
ADDR_TSL3: JP16.2 U16.P3
ADDR_TSL4: JP21.2 U20.P3
ADDR_TSL5: JP26.2 U24.P3
ADDR_TSL6: JP31.2 U28.P3
ADDR_TSL7: JP36.2 U32.P3
ADDR_TSL2561: JP3.2 U3.P3
CCS811_!INT!: B1.34 J13.7 U2.3
CCS811_!INT!1: B2.34 J23.7 U5.3
CCS811_!INT!2: B3.34 J35.7 U9.3
CCS811_!INT!3: B4.34 J47.7 U13.3
CCS811_!INT!4: B5.34 J59.7 U17.3
CCS811_!INT!5: B6.34 J71.7 U21.3
CCS811_!INT!6: B7.34 J83.7 U25.3
CCS811_!INT!7: B8.34 J95.7 U29.3
CCS811_!RST!: B1.33 J13.8 R1.1 U2.2
CCS811_!RST!1: B2.33 J23.8 R17.1 U5.2
CCS811_!RST!2: B3.33 J35.8 R29.1 U9.2
CCS811_!RST!3: B4.33 J47.8 R41.1 U13.2
CCS811_!RST!4: B5.33 J59.8 R53.1 U17.2
CCS811_!RST!5: B6.33 J71.8 R65.1 U21.2
CCS811_!RST!6: B7.33 J83.8 R77.1 U25.2
CCS811_!RST!7: B8.33 J95.8 R89.1 U29.2
CCS811_!WAKE!: B1.30 J13.11 U2.7
CCS811_!WAKE!1: B2.30 J23.11 U5.7
CCS811_!WAKE!2: B3.30 J35.11 U9.7
CCS811_!WAKE!3: B4.30 J47.11 U13.7
CCS811_!WAKE!4: B5.30 J59.11 U17.7
CCS811_!WAKE!5: B6.30 J71.11 U21.7
CCS811_!WAKE!6: B7.30 J83.11 U25.7
CCS811_!WAKE!7: B8.30 J95.11 U29.7
CCS811_ADDR: JP2.2 R6.1 U2.1
CCS811_ADDR1: JP8.2 R18.1 U5.1
CCS811_ADDR2: JP13.2 R30.1 U9.1
CCS811_ADDR3: JP18.2 R42.1 U13.1
CCS811_ADDR4: JP23.2 R54.1 U17.1
CCS811_ADDR5: JP28.2 R66.1 U21.1
CCS811_ADDR6: JP33.2 R78.1 U25.1
CCS811_ADDR7: JP38.2 R90.1 U29.1
CCS811_AUX: JP4.2 R10.1 R12.P$1 U2.8
CCS811_AUX1: JP9.2 R22.1 R24.P$1 U5.8
CCS811_AUX2: JP14.2 R34.1 R36.P$1 U9.8
CCS811_AUX3: JP19.2 R46.1 R48.P$1 U13.8
CCS811_AUX4: JP24.2 R58.1 R60.P$1 U17.8
CCS811_AUX5: JP29.2 R70.1 R72.P$1 U21.8
CCS811_AUX6: JP34.2 R82.1 R84.P$1 U25.8
CCS811_AUX7: JP39.2 R94.1 R96.P$1 U29.8
EXT_TEMPERATURE: B1.7 J3.2 J4.7
EXT_TEMPERATURE1: B2.7 J18.7 J24.2
EXT_TEMPERATURE2: B3.7 J30.7 J36.2
EXT_TEMPERATURE3: B4.7 J42.7 J48.2
EXT_TEMPERATURE4: B5.7 J54.7 J60.2
EXT_TEMPERATURE5: B6.7 J66.7 J72.2
EXT_TEMPERATURE6: B7.7 J78.7 J84.2
EXT_TEMPERATURE7: B8.7 J90.7 J96.2
GND: B1.1 B1.4 B1.21 B1.37 B1.40 C1.2 C2.2 C3.2 C4.2 C5.2 C6.2 J1.2 J1.3 J2.3 J3.1 J4.1 J4.4 J5.2 J7.2 J8.1 J13.1 J13.4 J13.20 JP1.1 JP2.1 JP3.1 U1.1 U1.7 U2.EP U3.P2 U4.2
GND1: B2.1 B2.4 B2.21 B2.37 B2.40 C7.2 C8.2 C9.2 C10.2 C11.2 C12.2 J6.1 J14.3 J15.2 J15.3 J16.2 J17.2 J18.1 J18.4 J23.1 J23.4 J23.20 J24.1 JP6.1 JP7.1 JP8.1 U5.EP U6.1 U6.7 U7.2 U8.P2
GND2: B3.1 B3.4 B3.21 B3.37 B3.40 C13.2 C14.2 C15.2 C16.2 C17.2 C18.2 J25.1 J26.3 J27.2 J27.3 J28.2 J29.2 J30.1 J30.4 J35.1 J35.4 J35.20 J36.1 JP11.1 JP12.1 JP13.1 U9.EP U10.1 U10.7 U11.2 U12.P2
GND3: B4.1 B4.4 B4.21 B4.37 B4.40 C19.2 C20.2 C21.2 C22.2 C23.2 C24.2 J37.1 J38.3 J39.2 J39.3 J40.2 J41.2 J42.1 J42.4 J47.1 J47.4 J47.20 J48.1 JP16.1 JP17.1 JP18.1 U13.EP U14.1 U14.7 U15.2 U16.P2
GND4: B5.1 B5.4 B5.21 B5.37 B5.40 C25.2 C26.2 C27.2 C28.2 C29.2 C30.2 J49.1 J50.3 J51.2 J51.3 J52.2 J53.2 J54.1 J54.4 J59.1 J59.4 J59.20 J60.1 JP21.1 JP22.1 JP23.1 U17.EP U18.1 U18.7 U19.2 U20.P2
GND5: B6.1 B6.4 B6.21 B6.37 B6.40 C31.2 C32.2 C33.2 C34.2 C35.2 C36.2 J61.1 J62.3 J63.2 J63.3 J64.2 J65.2 J66.1 J66.4 J71.1 J71.4 J71.20 J72.1 JP26.1 JP27.1 JP28.1 U21.EP U22.1 U22.7 U23.2 U24.P2
GND6: B7.1 B7.4 B7.21 B7.37 B7.40 C37.2 C38.2 C39.2 C40.2 C41.2 C42.2 J73.1 J74.3 J75.2 J75.3 J76.2 J77.2 J78.1 J78.4 J83.1 J83.4 J83.20 J84.1 JP31.1 JP32.1 JP33.1 U25.EP U26.1 U26.7 U27.2 U28.P2
GND7: B8.1 B8.4 B8.21 B8.37 B8.40 C43.2 C44.2 C45.2 C46.2 C47.2 C48.2 J85.1 J86.3 J87.2 J87.3 J88.2 J89.2 J90.1 J90.4 J95.1 J95.4 J95.20 J96.1 JP36.1 JP37.1 JP38.1 U29.EP U30.1 U30.7 U31.2 U32.P2
LUX_INT: B1.35 J13.6 U3.P6
LUX_INT1: B2.35 J23.6 U8.P6
LUX_INT2: B3.35 J35.6 U12.P6
LUX_INT3: B4.35 J47.6 U16.P6
LUX_INT4: B5.35 J59.6 U20.P6
LUX_INT5: B6.35 J71.6 U24.P6
LUX_INT6: B7.35 J83.6 U28.P6
LUX_INT7: B8.35 J95.6 U32.P6
N$1: JP3.3 R7.1
N$2: JP1.2 R4.1 U1.5
N$3: JP4.1 R8.1
N$4: JP5.3 R13.2
N$5: JP5.1 R14.2
N$6: B1.2 J4.2
N$7: B1.3 J4.3
N$8: B1.6 J4.6
N$9: B1.10 J4.10
N$10: JP6.3 R15.1
N$11: B1.14 J4.14
N$12: B1.15 J4.15
N$13: B1.16 J4.16
N$14: B1.17 J4.17
N$15: B1.18 J4.18
N$16: B1.19 J4.19
N$17: B1.20 J4.20
N$18: B1.39 J13.2
N$19: B1.38 J13.3
N$20: B1.32 J13.9
N$21: B1.31 J13.10
N$22: B1.8 J4.8
N$23: B1.29 J13.12
N$24: B1.28 J13.13
N$25: B1.27 J13.14
N$26: B1.26 J13.15
N$27: B1.24 J13.17
N$28: B1.23 J13.18
N$29: J11.1 J12.1
N$30: J11.2 J12.2
N$31: J11.3 J12.3
N$32: J11.4 J12.4
N$33: J11.5 J12.5
N$34: J11.6 J12.6
N$35: J11.7 J12.7
N$36: J11.8 J12.8
N$37: J11.9 J12.9
N$38: J11.10 J12.10
N$39: J11.11 J12.11
N$40: J11.12 J12.12
N$41: J11.13 J12.13
N$42: J11.14 J12.14
N$43: J11.15 J12.15
N$44: J11.16 J12.16
N$45: J11.17 J12.17
N$46: J11.18 J12.18
N$47: J11.19 J12.19
N$48: J11.20 J12.20
N$49: J9.1 J10.1
N$50: J9.2 J10.2
N$51: J9.3 J10.3
N$52: J9.4 J10.4
N$53: J9.5 J10.5
N$54: J9.6 J10.6
N$55: J9.7 J10.7
N$56: J9.8 J10.8
N$57: J9.9 J10.9
N$58: J9.10 J10.10
N$59: J9.11 J10.11
N$60: J9.12 J10.12
N$61: J9.13 J10.13
N$62: J9.14 J10.14
N$63: J9.15 J10.15
N$64: J9.16 J10.16
N$65: J9.17 J10.17
N$66: J9.18 J10.18
N$67: J9.19 J10.19
N$68: J9.20 J10.20
N$69: JP7.2 R16.1 U6.5
N$70: JP9.1 R23.1
N$71: JP10.3 R5.2
N$72: JP10.1 R11.2
N$73: B2.2 J18.2
N$74: B2.3 J18.3
N$75: B2.6 J18.6
N$76: B2.14 J18.14
N$77: B2.15 J18.15
N$78: B2.16 J18.16
N$79: B2.17 J18.17
N$80: B2.18 J18.18
N$81: B2.19 J18.19
N$82: B2.20 J18.20
N$83: B2.39 J23.2
N$84: B2.38 J23.3
N$85: B2.32 J23.9
N$86: B2.29 J23.12
N$87: B2.28 J23.13
N$88: B2.27 J23.14
N$89: B2.26 J23.15
N$90: B2.24 J23.17
N$91: B2.23 J23.18
N$92: J21.1 J22.1
N$93: J21.2 J22.2
N$94: J21.3 J22.3
N$95: J21.4 J22.4
N$96: J21.5 J22.5
N$97: J21.6 J22.6
N$98: J21.7 J22.7
N$99: J21.8 J22.8
N$100: J21.9 J22.9
N$101: J21.10 J22.10
N$102: J21.11 J22.11
N$103: J21.12 J22.12
N$104: J21.13 J22.13
N$105: J21.14 J22.14
N$106: J21.15 J22.15
N$107: J21.16 J22.16
N$108: J21.17 J22.17
N$109: J21.18 J22.18
N$110: J21.19 J22.19
N$111: J21.20 J22.20
N$112: J19.1 J20.1
N$113: J19.2 J20.2
N$114: J19.3 J20.3
N$115: J19.4 J20.4
N$116: J19.5 J20.5
N$117: J19.6 J20.6
N$118: J19.7 J20.7
N$119: J19.8 J20.8
N$120: J19.9 J20.9
N$121: J19.10 J20.10
N$122: J19.11 J20.11
N$123: J19.12 J20.12
N$124: J19.13 J20.13
N$125: J19.14 J20.14
N$126: J19.15 J20.15
N$127: J19.16 J20.16
N$128: J19.17 J20.17
N$129: J19.18 J20.18
N$130: J19.19 J20.19
N$131: J19.20 J20.20
N$132: B2.31 J23.10
N$133: B2.8 J18.8
N$134: B2.10 J18.10
N$135: JP11.3 R27.1
N$136: JP12.2 R28.1 U10.5
N$137: JP14.1 R35.1
N$138: JP15.3 R25.2
N$139: JP15.1 R26.2
N$140: B3.2 J30.2
N$141: B3.3 J30.3
N$142: B3.6 J30.6
N$143: B3.14 J30.14
N$144: B3.15 J30.15
N$145: B3.16 J30.16
N$146: B3.17 J30.17
N$147: B3.18 J30.18
N$148: B3.19 J30.19
N$149: B3.20 J30.20
N$150: B3.39 J35.2
N$151: B3.38 J35.3
N$152: B3.32 J35.9
N$153: B3.29 J35.12
N$154: B3.28 J35.13
N$155: B3.27 J35.14
N$156: B3.26 J35.15
N$157: B3.24 J35.17
N$158: B3.23 J35.18
N$159: J33.1 J34.1
N$160: J33.2 J34.2
N$161: J33.3 J34.3
N$162: J33.4 J34.4
N$163: J33.5 J34.5
N$164: J33.6 J34.6
N$165: J33.7 J34.7
N$166: J33.8 J34.8
N$167: J33.9 J34.9
N$168: J33.10 J34.10
N$169: J33.11 J34.11
N$170: J33.12 J34.12
N$171: J33.13 J34.13
N$172: J33.14 J34.14
N$173: J33.15 J34.15
N$174: J33.16 J34.16
N$175: J33.17 J34.17
N$176: J33.18 J34.18
N$177: J33.19 J34.19
N$178: J33.20 J34.20
N$179: J31.1 J32.1
N$180: J31.2 J32.2
N$181: J31.3 J32.3
N$182: J31.4 J32.4
N$183: J31.5 J32.5
N$184: J31.6 J32.6
N$185: J31.7 J32.7
N$186: J31.8 J32.8
N$187: J31.9 J32.9
N$188: J31.10 J32.10
N$189: J31.11 J32.11
N$190: J31.12 J32.12
N$191: J31.13 J32.13
N$192: J31.14 J32.14
N$193: J31.15 J32.15
N$194: J31.16 J32.16
N$195: J31.17 J32.17
N$196: J31.18 J32.18
N$197: J31.19 J32.19
N$198: J31.20 J32.20
N$199: B3.31 J35.10
N$200: B3.8 J30.8
N$201: B3.10 J30.10
N$202: JP16.3 R39.1
N$203: JP17.2 R40.1 U14.5
N$204: JP19.1 R47.1
N$205: JP20.3 R37.2
N$206: JP20.1 R38.2
N$207: B4.2 J42.2
N$208: B4.3 J42.3
N$209: B4.6 J42.6
N$210: B4.14 J42.14
N$211: B4.15 J42.15
N$212: B4.16 J42.16
N$213: B4.17 J42.17
N$214: B4.18 J42.18
N$215: B4.19 J42.19
N$216: B4.20 J42.20
N$217: B4.39 J47.2
N$218: B4.38 J47.3
N$219: B4.32 J47.9
N$220: B4.29 J47.12
N$221: B4.28 J47.13
N$222: B4.27 J47.14
N$223: B4.26 J47.15
N$224: B4.24 J47.17
N$225: B4.23 J47.18
N$226: J45.1 J46.1
N$227: J45.2 J46.2
N$228: J45.3 J46.3
N$229: J45.4 J46.4
N$230: J45.5 J46.5
N$231: J45.6 J46.6
N$232: J45.7 J46.7
N$233: J45.8 J46.8
N$234: J45.9 J46.9
N$235: J45.10 J46.10
N$236: J45.11 J46.11
N$237: J45.12 J46.12
N$238: J45.13 J46.13
N$239: J45.14 J46.14
N$240: J45.15 J46.15
N$241: J45.16 J46.16
N$242: J45.17 J46.17
N$243: J45.18 J46.18
N$244: J45.19 J46.19
N$245: J45.20 J46.20
N$246: J43.1 J44.1
N$247: J43.2 J44.2
N$248: J43.3 J44.3
N$249: J43.4 J44.4
N$250: J43.5 J44.5
N$251: J43.6 J44.6
N$252: J43.7 J44.7
N$253: J43.8 J44.8
N$254: J43.9 J44.9
N$255: J43.10 J44.10
N$256: J43.11 J44.11
N$257: J43.12 J44.12
N$258: J43.13 J44.13
N$259: J43.14 J44.14
N$260: J43.15 J44.15
N$261: J43.16 J44.16
N$262: J43.17 J44.17
N$263: J43.18 J44.18
N$264: J43.19 J44.19
N$265: J43.20 J44.20
N$266: B4.31 J47.10
N$267: B4.8 J42.8
N$268: B4.10 J42.10
N$269: JP21.3 R51.1
N$270: JP22.2 R52.1 U18.5
N$271: JP24.1 R59.1
N$272: JP25.3 R49.2
N$273: JP25.1 R50.2
N$274: B5.2 J54.2
N$275: B5.3 J54.3
N$276: B5.6 J54.6
N$277: B5.14 J54.14
N$278: B5.15 J54.15
N$279: B5.16 J54.16
N$280: B5.17 J54.17
N$281: B5.18 J54.18
N$282: B5.19 J54.19
N$283: B5.20 J54.20
N$284: B5.39 J59.2
N$285: B5.38 J59.3
N$286: B5.32 J59.9
N$287: B5.29 J59.12
N$288: B5.28 J59.13
N$289: B5.27 J59.14
N$290: B5.26 J59.15
N$291: B5.24 J59.17
N$292: B5.23 J59.18
N$293: J57.1 J58.1
N$294: J57.2 J58.2
N$295: J57.3 J58.3
N$296: J57.4 J58.4
N$297: J57.5 J58.5
N$298: J57.6 J58.6
N$299: J57.7 J58.7
N$300: J57.8 J58.8
N$301: J57.9 J58.9
N$302: J57.10 J58.10
N$303: J57.11 J58.11
N$304: J57.12 J58.12
N$305: J57.13 J58.13
N$306: J57.14 J58.14
N$307: J57.15 J58.15
N$308: J57.16 J58.16
N$309: J57.17 J58.17
N$310: J57.18 J58.18
N$311: J57.19 J58.19
N$312: J57.20 J58.20
N$313: J55.1 J56.1
N$314: J55.2 J56.2
N$315: J55.3 J56.3
N$316: J55.4 J56.4
N$317: J55.5 J56.5
N$318: J55.6 J56.6
N$319: J55.7 J56.7
N$320: J55.8 J56.8
N$321: J55.9 J56.9
N$322: J55.10 J56.10
N$323: J55.11 J56.11
N$324: J55.12 J56.12
N$325: J55.13 J56.13
N$326: J55.14 J56.14
N$327: J55.15 J56.15
N$328: J55.16 J56.16
N$329: J55.17 J56.17
N$330: J55.18 J56.18
N$331: J55.19 J56.19
N$332: J55.20 J56.20
N$333: B5.31 J59.10
N$334: B5.8 J54.8
N$335: B5.10 J54.10
N$336: JP26.3 R63.1
N$337: JP27.2 R64.1 U22.5
N$338: JP29.1 R71.1
N$339: JP30.3 R61.2
N$340: JP30.1 R62.2
N$341: B6.2 J66.2
N$342: B6.3 J66.3
N$343: B6.6 J66.6
N$344: B6.14 J66.14
N$345: B6.15 J66.15
N$346: B6.16 J66.16
N$347: B6.17 J66.17
N$348: B6.18 J66.18
N$349: B6.19 J66.19
N$350: B6.20 J66.20
N$351: B6.39 J71.2
N$352: B6.38 J71.3
N$353: B6.32 J71.9
N$354: B6.29 J71.12
N$355: B6.28 J71.13
N$356: B6.27 J71.14
N$357: B6.26 J71.15
N$358: B6.24 J71.17
N$359: B6.23 J71.18
N$360: J69.1 J70.1
N$361: J69.2 J70.2
N$362: J69.3 J70.3
N$363: J69.4 J70.4
N$364: J69.5 J70.5
N$365: J69.6 J70.6
N$366: J69.7 J70.7
N$367: J69.8 J70.8
N$368: J69.9 J70.9
N$369: J69.10 J70.10
N$370: J69.11 J70.11
N$371: J69.12 J70.12
N$372: J69.13 J70.13
N$373: J69.14 J70.14
N$374: J69.15 J70.15
N$375: J69.16 J70.16
N$376: J69.17 J70.17
N$377: J69.18 J70.18
N$378: J69.19 J70.19
N$379: J69.20 J70.20
N$380: J67.1 J68.1
N$381: J67.2 J68.2
N$382: J67.3 J68.3
N$383: J67.4 J68.4
N$384: J67.5 J68.5
N$385: J67.6 J68.6
N$386: J67.7 J68.7
N$387: J67.8 J68.8
N$388: J67.9 J68.9
N$389: J67.10 J68.10
N$390: J67.11 J68.11
N$391: J67.12 J68.12
N$392: J67.13 J68.13
N$393: J67.14 J68.14
N$394: J67.15 J68.15
N$395: J67.16 J68.16
N$396: J67.17 J68.17
N$397: J67.18 J68.18
N$398: J67.19 J68.19
N$399: J67.20 J68.20
N$400: B6.31 J71.10
N$401: B6.8 J66.8
N$402: B6.10 J66.10
N$403: JP31.3 R75.1
N$404: JP32.2 R76.1 U26.5
N$405: JP34.1 R83.1
N$406: JP35.3 R73.2
N$407: JP35.1 R74.2
N$408: B7.2 J78.2
N$409: B7.3 J78.3
N$410: B7.6 J78.6
N$411: B7.14 J78.14
N$412: B7.15 J78.15
N$413: B7.16 J78.16
N$414: B7.17 J78.17
N$415: B7.18 J78.18
N$416: B7.19 J78.19
N$417: B7.20 J78.20
N$418: B7.39 J83.2
N$419: B7.38 J83.3
N$420: B7.32 J83.9
N$421: B7.29 J83.12
N$422: B7.28 J83.13
N$423: B7.27 J83.14
N$424: B7.26 J83.15
N$425: B7.24 J83.17
N$426: B7.23 J83.18
N$427: J81.1 J82.1
N$428: J81.2 J82.2
N$429: J81.3 J82.3
N$430: J81.4 J82.4
N$431: J81.5 J82.5
N$432: J81.6 J82.6
N$433: J81.7 J82.7
N$434: J81.8 J82.8
N$435: J81.9 J82.9
N$436: J81.10 J82.10
N$437: J81.11 J82.11
N$438: J81.12 J82.12
N$439: J81.13 J82.13
N$440: J81.14 J82.14
N$441: J81.15 J82.15
N$442: J81.16 J82.16
N$443: J81.17 J82.17
N$444: J81.18 J82.18
N$445: J81.19 J82.19
N$446: J81.20 J82.20
N$447: J79.1 J80.1
N$448: J79.2 J80.2
N$449: J79.3 J80.3
N$450: J79.4 J80.4
N$451: J79.5 J80.5
N$452: J79.6 J80.6
N$453: J79.7 J80.7
N$454: J79.8 J80.8
N$455: J79.9 J80.9
N$456: J79.10 J80.10
N$457: J79.11 J80.11
N$458: J79.12 J80.12
N$459: J79.13 J80.13
N$460: J79.14 J80.14
N$461: J79.15 J80.15
N$462: J79.16 J80.16
N$463: J79.17 J80.17
N$464: J79.18 J80.18
N$465: J79.19 J80.19
N$466: J79.20 J80.20
N$467: B7.31 J83.10
N$468: B7.8 J78.8
N$469: B7.10 J78.10
N$470: JP36.3 R87.1
N$471: JP37.2 R88.1 U30.5
N$472: JP39.1 R95.1
N$473: JP40.3 R85.2
N$474: JP40.1 R86.2
N$475: B8.2 J90.2
N$476: B8.3 J90.3
N$477: B8.6 J90.6
N$478: B8.14 J90.14
N$479: B8.15 J90.15
N$480: B8.16 J90.16
N$481: B8.17 J90.17
N$482: B8.18 J90.18
N$483: B8.19 J90.19
N$484: B8.20 J90.20
N$485: B8.39 J95.2
N$486: B8.38 J95.3
N$487: B8.32 J95.9
N$488: B8.29 J95.12
N$489: B8.28 J95.13
N$490: B8.27 J95.14
N$491: B8.26 J95.15
N$492: B8.24 J95.17
N$493: B8.23 J95.18
N$494: J93.1 J94.1
N$495: J93.2 J94.2
N$496: J93.3 J94.3
N$497: J93.4 J94.4
N$498: J93.5 J94.5
N$499: J93.6 J94.6
N$500: J93.7 J94.7
N$501: J93.8 J94.8
N$502: J93.9 J94.9
N$503: J93.10 J94.10
N$504: J93.11 J94.11
N$505: J93.12 J94.12
N$506: J93.13 J94.13
N$507: J93.14 J94.14
N$508: J93.15 J94.15
N$509: J93.16 J94.16
N$510: J93.17 J94.17
N$511: J93.18 J94.18
N$512: J93.19 J94.19
N$513: J93.20 J94.20
N$514: J91.1 J92.1
N$515: J91.2 J92.2
N$516: J91.3 J92.3
N$517: J91.4 J92.4
N$518: J91.5 J92.5
N$519: J91.6 J92.6
N$520: J91.7 J92.7
N$521: J91.8 J92.8
N$522: J91.9 J92.9
N$523: J91.10 J92.10
N$524: J91.11 J92.11
N$525: J91.12 J92.12
N$526: J91.13 J92.13
N$527: J91.14 J92.14
N$528: J91.15 J92.15
N$529: J91.16 J92.16
N$530: J91.17 J92.17
N$531: J91.18 J92.18
N$532: J91.19 J92.19
N$533: J91.20 J92.20
N$534: B8.31 J95.10
N$535: B8.8 J90.8
N$536: B8.10 J90.10
NTC_SENSE: R8.2 R12.P$2 U2.4 U2.5
NTC_SENSE1: R23.2 R24.P$2 U5.4 U5.5
NTC_SENSE2: R35.2 R36.P$2 U9.4 U9.5
NTC_SENSE3: R47.2 R48.P$2 U13.4 U13.5
NTC_SENSE4: R59.2 R60.P$2 U17.4 U17.5
NTC_SENSE5: R71.2 R72.P$2 U21.4 U21.5
NTC_SENSE6: R83.2 R84.P$2 U25.4 U25.5
NTC_SENSE7: R95.2 R96.P$2 U29.4 U29.5
RAINFALL: B1.12 C3.1 J2.4 J4.12 R9.1 U4.3
RAINFALL1: B2.12 C11.1 J14.4 J18.12 R19.1 U7.3
RAINFALL2: B3.12 C17.1 J26.4 J30.12 R31.1 U11.3
RAINFALL3: B4.12 C23.1 J38.4 J42.12 R43.1 U15.3
RAINFALL4: B5.12 C29.1 J50.4 J54.12 R55.1 U19.3
RAINFALL5: B6.12 C35.1 J62.4 J66.12 R67.1 U23.3
RAINFALL6: B7.12 C41.1 J74.4 J78.12 R79.1 U27.3
RAINFALL7: B8.12 C47.1 J86.4 J90.12 R91.1 U31.3
SCL: B1.25 J8.4 J13.16 R14.1 U1.4 U2.10 U3.P4
SCL1: B2.25 J6.4 J23.16 R11.1 U5.10 U6.4 U8.P4
SCL2: B3.25 J25.4 J35.16 R26.1 U9.10 U10.4 U12.P4
SCL3: B4.25 J37.4 J47.16 R38.1 U13.10 U14.4 U16.P4
SCL4: B5.25 J49.4 J59.16 R50.1 U17.10 U18.4 U20.P4
SCL5: B6.25 J61.4 J71.16 R62.1 U21.10 U22.4 U24.P4
SCL6: B7.25 J73.4 J83.16 R74.1 U25.10 U26.4 U28.P4
SCL7: B8.25 J85.4 J95.16 R86.1 U29.10 U30.4 U32.P4
SDA: B1.22 J8.3 J13.19 R13.1 U1.3 U2.9 U3.P5
SDA1: B2.22 J6.3 J23.19 R5.1 U5.9 U6.3 U8.P5
SDA2: B3.22 J25.3 J35.19 R25.1 U9.9 U10.3 U12.P5
SDA3: B4.22 J37.3 J47.19 R37.1 U13.9 U14.3 U16.P5
SDA4: B5.22 J49.3 J59.19 R49.1 U17.9 U18.3 U20.P5
SDA5: B6.22 J61.3 J71.19 R61.1 U21.9 U22.3 U24.P5
SDA6: B7.22 J73.3 J83.19 R73.1 U25.9 U26.3 U28.P5
SDA7: B8.22 J85.3 J95.19 R85.1 U29.9 U30.3 U32.P5
SOIL_MOISTURE: B1.11 J4.11 J5.3 J7.1
SOIL_MOISTURE1: B2.11 J16.3 J17.1 J18.11
SOIL_MOISTURE2: B3.11 J28.3 J29.1 J30.11
SOIL_MOISTURE3: B4.11 J40.3 J41.1 J42.11
SOIL_MOISTURE4: B5.11 J52.3 J53.1 J54.11
SOIL_MOISTURE5: B6.11 J64.3 J65.1 J66.11
SOIL_MOISTURE6: B7.11 J76.3 J77.1 J78.11
SOIL_MOISTURE7: B8.11 J88.3 J89.1 J90.11
WIND_DIR: B1.13 J1.5 J4.13 R2.1 U4.6
WIND_DIR1: B2.13 J15.5 J18.13 R20.1 U7.6
WIND_DIR2: B3.13 J27.5 J30.13 R32.1 U11.6
WIND_DIR3: B4.13 J39.5 J42.13 R44.1 U15.6
WIND_DIR4: B5.13 J51.5 J54.13 R56.1 U19.6
WIND_DIR5: B6.13 J63.5 J66.13 R68.1 U23.6
WIND_DIR6: B7.13 J75.5 J78.13 R80.1 U27.6
WIND_DIR7: B8.13 J87.5 J90.13 R92.1 U31.6
WIND_SPEED: B1.9 C5.1 J1.4 J4.9 R3.1 U4.4
WIND_SPEED1: B2.9 C12.1 J15.4 J18.9 R21.1 U7.4
WIND_SPEED2: B3.9 C18.1 J27.4 J30.9 R33.1 U11.4
WIND_SPEED3: B4.9 C24.1 J39.4 J42.9 R45.1 U15.4
WIND_SPEED4: B5.9 C30.1 J51.4 J54.9 R57.1 U19.4
WIND_SPEED5: B6.9 C36.1 J63.4 J66.9 R69.1 U23.4
WIND_SPEED6: B7.9 C42.1 J75.4 J78.9 R81.1 U27.4
WIND_SPEED7: B8.9 C48.1 J87.4 J90.9 R93.1 U31.4

## Tracks (layer width: path | path; a pad name or v marks a point on that pad's centre or on a via)
3.3V  (via drill 0.38)
  Top 0.178: R6.2 R1.2 | U3.P1 63.1,15.26 63.12,15.24
  Top 0.254: U2.6 63.43,33.91 63.92,34.41 | R1.2 v63.36,27.34 63.62,27.6 R10.2 | 59.69,15.24 55.12,15.24 B1.36 J13.5 | 59.69,15.24 61.38,15.24 | 61.38,15.24 63.12,15.24 64.48,15.24 R7.2 | J8.2 59.69,15.24 | U1.2 59.96,48.44 v59.69,48.72 | C4.1 64.77,46.23 | 63.92,34.41 C2.1 60.33,35.43 57.86,32.97 56.36,32.97 54.99,34.34 v54.99,34.8 | 63.92,34.41 64.15,34.41 64.9,33.66 v64.9,32.44 | v59.69,51.31 R4.2 | J4.5 B1.5 | C6.1 61.38,15.24 | U1.8 63.74,47.79 63.83,47.7 64.77,47.7 | U1.6 63.67,49.09 63.75,49.17 64.69,49.17 v65.15,48.72 65.15,48.08 64.77,47.7 | R3.2 v26.16,34.8 26.16,35.52 25.74,35.94 R2.2 | v26.16,28.45 25.85,28.76 25.2,28.76 25.02,28.57 25.02,27.85 R9.2 | U4.5 v26.92,32.26 | 64.77,47.7 64.77,46.23 | 64.77,46.23 64.77,44.83 64.64,44.7 C1.1
  Bottom 0.178: JP5.2 59.64,48.77 v59.69,48.72
  Bottom 0.254: 49.53,19.56 50.8,18.29 B1.36 | B1.5 29.21,19.56 | 29.21,19.56 49.53,19.56 | 49.53,19.56 49.53,34.8 | 49.53,34.8 49.53,53.85 50.8,55.12 55.88,55.12 v59.69,51.31 59.69,49.73 | J5.1 14.03,29.72 J7.3 15.3,28.45 v26.16,28.45 | J3.3 27.18,8.64 27.18,19.56 | 27.18,19.56 27.18,25.91 26.16,26.92 v26.16,28.45 | 29.21,19.56 27.18,19.56 | v64.9,32.44 64.41,31.95 64.41,28.4 v63.36,27.34 | v59.69,48.72 59.69,49.73 | v65.15,48.72 64.14,49.73 59.69,49.73 | v54.99,34.8 49.53,34.8 | v26.16,28.45 26.16,32.26 | 26.16,32.26 v26.16,34.8 | v26.92,32.26 26.16,32.26
3.3V1  (via drill 0.38)
  Top 0.178: R18.2 R17.2 | U8.P1 63.1,74.69 63.12,74.68
  Top 0.254: U5.6 63.43,93.35 63.92,93.84 | R17.2 v63.36,86.78 63.62,87.03 R22.2 | 59.69,74.68 55.12,74.68 B2.36 J23.5 | 59.69,74.68 61.38,74.68 | 61.38,74.68 63.12,74.68 64.48,74.68 R15.2 | J6.2 59.69,74.68 | U6.2 59.96,107.88 v59.69,108.15 | C9.1 64.77,105.66 | 63.92,93.84 C10.1 60.33,94.87 57.86,92.41 56.36,92.41 54.99,93.78 v54.99,94.23 | 63.92,93.84 64.15,93.84 64.9,93.09 v64.9,91.87 | v59.69,110.74 R16.2 | J18.5 B2.5 | C7.1 61.38,74.68 | U6.8 63.74,107.23 63.83,107.14 64.77,107.14 | U6.6 63.67,108.53 63.75,108.61 64.69,108.61 v65.15,108.15 65.15,107.52 64.77,107.14 | R21.2 v26.16,94.23 26.16,94.96 25.74,95.38 R20.2 | v26.16,87.88 25.85,88.19 25.2,88.19 25.02,88.01 25.02,87.29 R19.2 | U7.5 v26.92,91.69 | 64.77,107.14 64.77,105.66 | 64.77,105.66 64.77,104.27 64.64,104.14 C8.1
  Bottom 0.178: JP10.2 59.64,108.2 v59.69,108.15
  Bottom 0.254: 49.53,78.99 50.8,77.72 B2.36 | B2.5 29.21,78.99 | 29.21,78.99 49.53,78.99 | 49.53,78.99 49.53,94.23 | 49.53,94.23 49.53,113.28 50.8,114.55 55.88,114.55 v59.69,110.74 59.69,109.17 | J16.1 14.03,89.15 J17.3 15.3,87.88 v26.16,87.88 | J24.3 27.18,68.07 27.18,78.99 | 27.18,78.99 27.18,85.34 26.16,86.36 v26.16,87.88 | 29.21,78.99 27.18,78.99 | v64.9,91.87 64.41,91.39 64.41,87.83 v63.36,86.78 | v59.69,108.15 59.69,109.17 | v65.15,108.15 64.14,109.17 59.69,109.17 | v54.99,94.23 49.53,94.23 | v26.16,87.88 26.16,91.69 | 26.16,91.69 v26.16,94.23 | v26.92,91.69 26.16,91.69
3.3V2  (via drill 0.38)
  Top 0.178: R30.2 R29.2 | U12.P1 126.6,15.26 126.62,15.24
  Top 0.254: U9.6 126.93,33.91 127.42,34.41 | R29.2 v126.86,27.34 127.11,27.6 R34.2 | 123.19,15.24 118.62,15.24 B3.36 J35.5 | 123.19,15.24 124.88,15.24 | 124.88,15.24 126.62,15.24 127.98,15.24 R27.2 | J25.2 123.19,15.24 | U10.2 123.46,48.44 v123.19,48.72 | C15.1 128.27,46.23 | 127.42,34.41 C16.1 123.83,35.43 121.36,32.97 119.86,32.97 118.49,34.34 v118.49,34.8 | 127.42,34.41 127.65,34.41 128.4,33.66 v128.4,32.44 | v123.19,51.31 R28.2 | J30.5 B3.5 | C13.1 124.88,15.24 | U10.8 127.24,47.79 127.33,47.7 128.27,47.7 | U10.6 127.17,49.09 127.25,49.17 128.19,49.17 v128.65,48.72 128.65,48.08 128.27,47.7 | R33.2 v89.66,34.8 89.66,35.52 89.24,35.94 R32.2 | v89.66,28.45 89.35,28.76 88.7,28.76 88.52,28.57 88.52,27.85 R31.2 | U11.5 v90.42,32.26 | 128.27,47.7 128.27,46.23 | 128.27,46.23 128.27,44.83 128.14,44.7 C14.1
  Bottom 0.178: JP15.2 123.14,48.77 v123.19,48.72
  Bottom 0.254: 113.03,19.56 114.3,18.29 B3.36 | B3.5 92.71,19.56 | 92.71,19.56 113.03,19.56 | 113.03,19.56 113.03,34.8 | 113.03,34.8 113.03,53.85 114.3,55.12 119.38,55.12 v123.19,51.31 123.19,49.73 | J28.1 77.53,29.72 J29.3 78.8,28.45 v89.66,28.45 | J36.3 90.68,8.64 90.68,19.56 | 90.68,19.56 90.68,25.91 89.66,26.92 v89.66,28.45 | 92.71,19.56 90.68,19.56 | v128.4,32.44 127.91,31.95 127.91,28.4 v126.86,27.34 | v123.19,48.72 123.19,49.73 | v128.65,48.72 127.64,49.73 123.19,49.73 | v118.49,34.8 113.03,34.8 | v89.66,28.45 89.66,32.26 | 89.66,32.26 v89.66,34.8 | v90.42,32.26 89.66,32.26
3.3V3  (via drill 0.38)
  Top 0.178: R42.2 R41.2 | U16.P1 126.6,74.69 126.62,74.68
  Top 0.254: U13.6 126.93,93.35 127.42,93.84 | R41.2 v126.86,86.78 127.11,87.03 R46.2 | 123.19,74.68 118.62,74.68 B4.36 J47.5 | 123.19,74.68 124.88,74.68 | 124.88,74.68 126.62,74.68 127.98,74.68 R39.2 | J37.2 123.19,74.68 | U14.2 123.46,107.88 v123.19,108.15 | C21.1 128.27,105.66 | 127.42,93.84 C22.1 123.83,94.87 121.36,92.41 119.86,92.41 118.49,93.78 v118.49,94.23 | 127.42,93.84 127.65,93.84 128.4,93.09 v128.4,91.87 | v123.19,110.74 R40.2 | J42.5 B4.5 | C19.1 124.88,74.68 | U14.8 127.24,107.23 127.33,107.14 128.27,107.14 | U14.6 127.17,108.53 127.25,108.61 128.19,108.61 v128.65,108.15 128.65,107.52 128.27,107.14 | R45.2 v89.66,94.23 89.66,94.96 89.24,95.38 R44.2 | v89.66,87.88 89.35,88.19 88.7,88.19 88.52,88.01 88.52,87.29 R43.2 | U15.5 v90.42,91.69 | 128.27,107.14 128.27,105.66 | 128.27,105.66 128.27,104.27 128.14,104.14 C20.1
  Bottom 0.178: JP20.2 123.14,108.2 v123.19,108.15
  Bottom 0.254: 113.03,78.99 114.3,77.72 B4.36 | B4.5 92.71,78.99 | 92.71,78.99 113.03,78.99 | 113.03,78.99 113.03,94.23 | 113.03,94.23 113.03,113.28 114.3,114.55 119.38,114.55 v123.19,110.74 123.19,109.17 | J40.1 77.53,89.15 J41.3 78.8,87.88 v89.66,87.88 | J48.3 90.68,68.07 90.68,78.99 | 90.68,78.99 90.68,85.34 89.66,86.36 v89.66,87.88 | 92.71,78.99 90.68,78.99 | v128.4,91.87 127.91,91.39 127.91,87.83 v126.86,86.78 | v123.19,108.15 123.19,109.17 | v128.65,108.15 127.64,109.17 123.19,109.17 | v118.49,94.23 113.03,94.23 | v89.66,87.88 89.66,91.69 | 89.66,91.69 v89.66,94.23 | v90.42,91.69 89.66,91.69
3.3V4  (via drill 0.38)
  Top 0.178: R54.2 R53.2 | U20.P1 190.1,15.26 190.12,15.24
  Top 0.254: U17.6 190.43,33.91 190.92,34.41 | R53.2 v190.36,27.34 190.62,27.6 R58.2 | 186.69,15.24 182.12,15.24 B5.36 J59.5 | 186.69,15.24 188.38,15.24 | 188.38,15.24 190.12,15.24 191.48,15.24 R51.2 | J49.2 186.69,15.24 | U18.2 186.96,48.44 v186.69,48.72 | C27.1 191.77,46.23 | 190.92,34.41 C28.1 187.32,35.43 184.86,32.97 183.36,32.97 181.99,34.34 v181.99,34.8 | 190.92,34.41 191.15,34.41 191.9,33.66 v191.9,32.44 | v186.69,51.31 R52.2 | J54.5 B5.5 | C25.1 188.38,15.24 | U18.8 190.74,47.79 190.83,47.7 191.77,47.7 | U18.6 190.67,49.09 190.75,49.17 191.69,49.17 v192.15,48.72 192.15,48.08 191.77,47.7 | R57.2 v153.16,34.8 153.16,35.52 152.74,35.94 R56.2 | v153.16,28.45 152.85,28.76 152.2,28.76 152.02,28.57 152.02,27.85 R55.2 | U19.5 v153.92,32.26 | 191.77,47.7 191.77,46.23 | 191.77,46.23 191.77,44.83 191.64,44.7 C26.1
  Bottom 0.178: JP25.2 186.64,48.77 v186.69,48.72